# Altium PCB LDO_12V-5V.PcbDoc
Units mil, origin at the board's own origin, x right, y up, seen from the top; angles counter-clockwise.
Board outline 6000 x 4000 mil, 2 copper layers (Top Layer, Bottom Layer); 4 components, 0 nets, 11 pads, 0 vias.
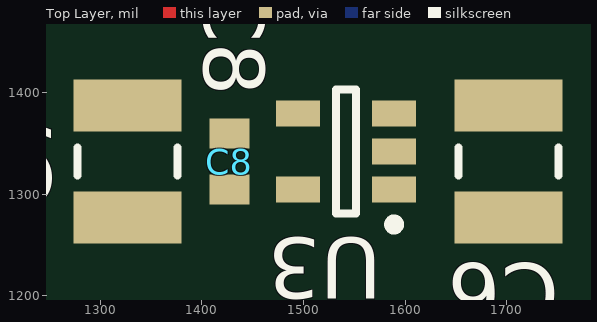
[diagram p0: Top Layer view]
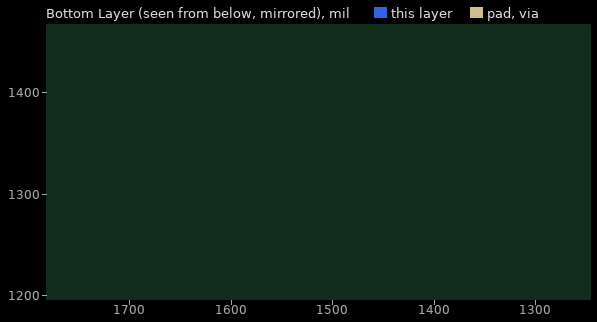
[diagram p1: Bottom Layer view, seen from below]

## Layer stack, top to bottom
Top Solder: solder mask 0.4, Solder Resist, Dk 3.5
Top Layer: signal copper 1.4
Dielectric 1: dielectric 12.6, FR-4, Dk 4.8
Bottom Layer: signal copper 1.4
Bottom Solder: solder mask 0.4, Solder Resist, Dk 3.5

## Board outline
1000,1000 7000,1000 7000,5000 1000,5000

## Design rules (kind name [scope] priority, off if disabled: settings)
Clearance [All] p1: gap=10 ignorepadtopadclearanceinfootprint=FALSE except(0: Arc-Hole Track-Hole SMDPad-Hole THPad-Hole Via-Hole Fill-Hole Poly-Hole Region-Hole Text-Hole)
PolygonConnect [All] p1: connectstyle=Relief reliefconductorwidth=10 reliefentries=4 polygonreliefangle="90 Angle" airgapwidth=10
RoutingVias [All] p1: holewidth=28 width=50 viastyle="Through Hole" minholewidth=28 minwidth=50 maxholewidth=28 maxwidth=50
SolderMaskExpansion [All] p1: expansion=4
Width [All] p1: maxlimit=10 minlimit=10 preferedwidth=10
30 further rules are at their usual default settings.

## Components (designator, comment, footprint, x,y, rotation, side; value= is the part's Value field where it differs from the comment)
C6 "C3225X7R1E106K250AC" PCB-J0JK5XR8QBNASKONCCG4-1 1701.84,1331.84 r270 top value=10.0µF
C7 "C3225X7R1E106K250AC" PCB-J0JK5XR8QBNASKONCCG4-1 1326.84,1331.84 r270 top value=10.0µF
C8 "CL10B104KB8NNNC" PCB-MHHQFTC5ILNRG4QI8DS6-1 1426.84,1331.84 r270 top value=0.1µF
U3 "MIC5205-5.0YM5-TR" SOT-23-5_N 1541.84,1341.84 r180 top

## Footprints (in the part's own frame and the unit in brackets; to place one, negate y for a bottom-side part, rotate by r counter-clockwise, add the part's x,y. Pads: shape width x height; smd on the part's side, far side on the other; paste and mask are expansions set on the pad)
PCB-J0JK5XR8QBNASKONCCG4-1 [mm] "CAPC3225X279X50NL20T25"
  rect 1.3x2.7 smd: 1(-1.4,0) 2(1.4,0)
  silkscreen extent -0.35,-1.25 0.35,1.25, body extent -1.7,-1.35 1.7,1.35, height 2.79
PCB-MHHQFTC5ILNRG4QI8DS6-1 [mm] "CAPC1608X90X35NL15T15"
  rect 0.75x1 smd: 1(-0.7,0) 2(0.7,0)
  body extent -0.88,-0.48 0.87,0.48, height 0.9
SOT-23-5_N [mm]
  rect 1.1x0.65 smd: 1(-1.2,0.95) 2(-1.2,0) 3(-1.2,-0.95) 4(1.2,-0.95) 5(1.2,0.95)
  silkscreen extent -1.33,-1.55 0.25,1.95, body extent -1.4,-1.45 1.4,1.45, height 1.45

## Part data
C6 C7: library part CMP-2bdce35de069f41b-1, "CAP CER 10uF ±10% 25V X7R 1210", Case/Package=1210, Manufacturer=TDK, Supplier Part Number 1=445-3942-1-ND, ManufacturerPartNumber=C3225X7R1E106K250AC, Mounting Type=SMT, OctopartID=2bdce35de069f41b, Octopart URL=http://octopart.com/c3225x7r1e106k250ac-tdk-25947859, Supplier 1=Digi-Key, Type=X7R
C8: library part CMP-1af8d38ac64bc53f-5, "CAP CER 0.1UF 50V X7R 0603", Manufacturer="Samsung Electro-Mechanics", Supplier Part Number 1=1276-1000-1-ND, ManufacturerPartNumber=CL10B104KB8NNNC, Mounting Type=SMT, OctopartID=1af8d38ac64bc53f, Octopart URL=https://octopart.com/cl10b104kb8nnnc-samsung-7928277, Supplier 1=Digi-Key, Type=X7R
U3: library part CMP-6255a8a416e5bd92-5, "IC Regulator LDO 5 V Fixed Output 150 mA SOT-23-5", Manufacturer=Microchip, Supplier Part Number 1=576-1261-1-ND, ManufacturerPartNumber=MIC5205-5.0YM5-TR, Mounting Type=SMT, Octopart URL=https://octopart.com/mic5205-5.0ym5-tr-microchip-66802134, Supplier 1=Digi-Key

## Nets (pads, with @x,y where several pads share a name; then routed paths per layer and width w, separated by ;. In a path a pad name is that pad's centre, name@x,y a point inside that pad or via, vN(x,y) a via of type N, cw(c..) or ccw(c..) an arc to the next point about the centre after c; other vN are vias at no path point)
pads on no net: C6.1 C6.2 C7.1 C7.2 C8.1 C8.2 U3.1 U3.2 U3.3 U3.4 U3.5